# EAGLE board Graphic LCD Backpack-v15 (EAGLE 6.4)
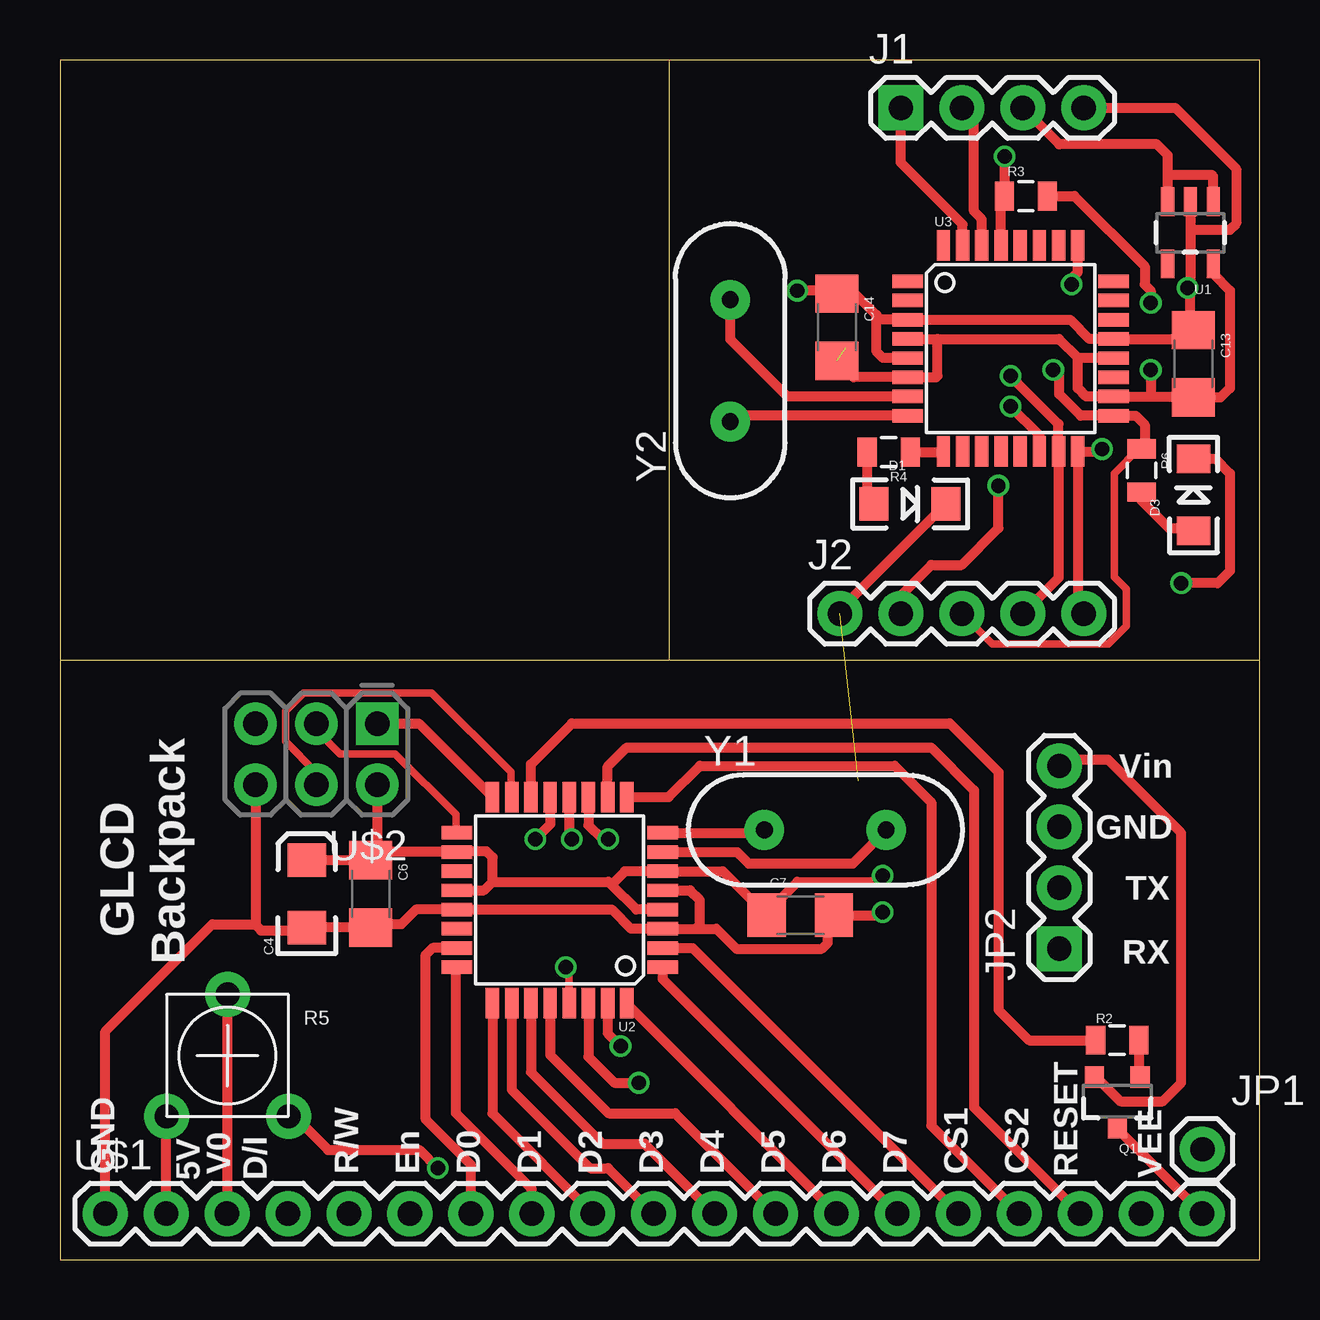
[diagram p0: board, top side]
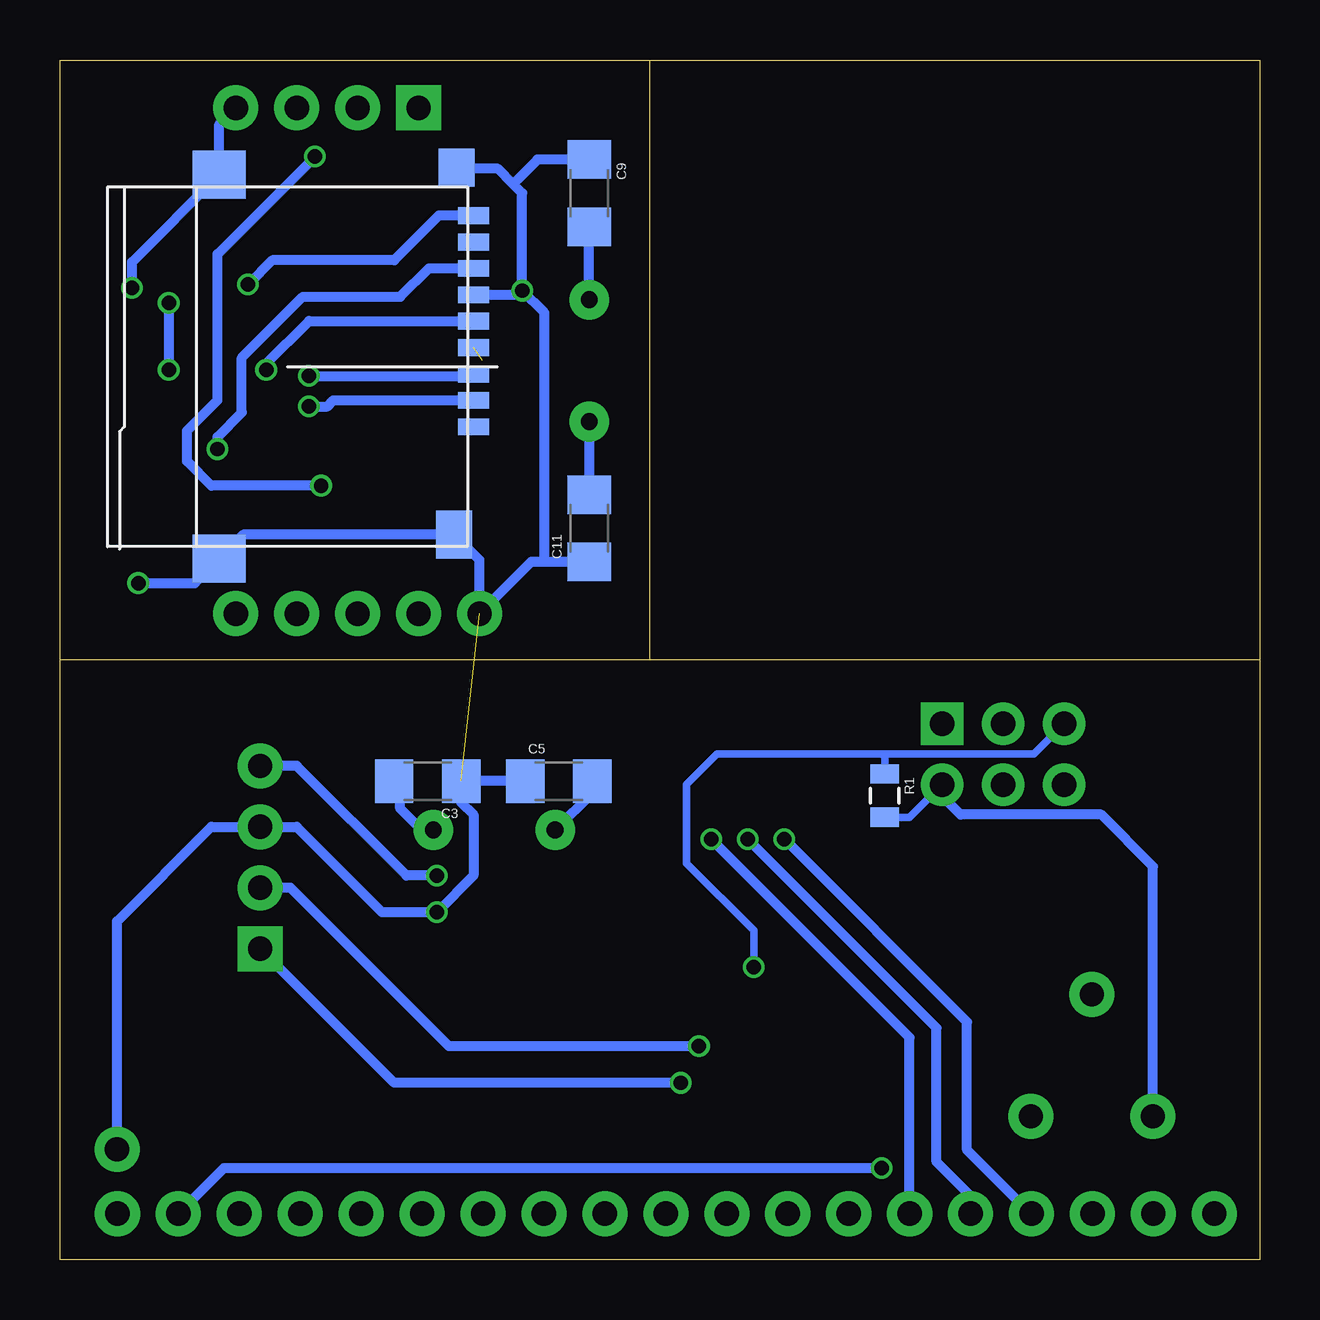
[diagram p1: board, bottom side, seen from below]

Size 50 x 50 mm. Coordinates in mm from the lower left corner, seen from the top.
Outline: 50,25 50,0 0,0 0,25
Outline: 50,25 50,50 25.4,50
Outline: 25.4,50 0,50 0,25
Outline: 0,25 25.4,25
Outline: 25.4,25 50,25
Outline: 25.4,25 25.4,50
Copper layers (1*16): Top 0.035mm / dielectric 1.5mm / Bottom 0.035mm
Design rules "SeeedStudio_2layer_DRU_no_angle_20140221": minimum track width 6mil, minimum drill 12mil, track to track 6mil, track to pad 6mil, pad to pad 6mil, via to via 6mil, smd to smd 0mil, copper to edge 10mil, drill to drill 10mil, minimum pad ring 10mil, minimum via ring 6mil, stop-mask expansion 2mil, vias tented up to drill 100mil, thermal gap 10mil
Net classes: 0 default: width 0.178 mm; 1 vcc: width 0.203 mm

## Footprints (pad centres in the part's own frame; a part is rotated, then mirrored left to right if it is on the bottom)
1206 = smd 1.6 x 1.8: 1 -1.4,0; 2 1.4,0
EIA3216 = smd 1.4 x 1.6: A 1.4,0; C -1.4,0
LED-1206 = smd 1.2 x 1.4: A -1.5,0; C 1.5,0
1X04 = drill 1.016 pad 1.88 square: 1 0,0 | drill 1.016 pad 1.88: 2 2.54,0; 3 5.08,0; 4 7.62,0
1X05 = drill 1.016 pad 1.88: 1 0,0; 2 2.54,0; 3 5.08,0; 4 7.62,0; 5 10.16,0
1X01 = drill 1.016 pad 1.88: 1 0,0
SOT23-3 = smd 0.8 x 0.9: 1 -0.95,-1; 2 0.95,-1; 3 0,1.1
0805 = smd 0.8 x 1.2: 1 -0.9,0; 2 0.9,0
TRIM_POT_PTH = drill 1 pad 1.88: 1 -2.54,-2.54; 2 0,2.54; 3 2.54,-2.54
SOT23-5 = smd 0.55 x 1.2: 1 -0.95,-1.3; 2 0,-1.3; 3 0.95,-1.3; 4 0.95,1.3; 5 -0.95,1.3
TQFP32-08 = smd 1.27 x 0.559: 1 -4.293,2.8; 2 -4.293,2; 3 -4.293,1.2; 4 -4.293,0.4; 5 -4.293,-0.4; 6 -4.293,-1.2; 7 -4.293,-2; 8 -4.293,-2.8; 17 4.293,-2.8; 18 4.293,-2; 19 4.293,-1.2; 20 4.293,-0.4; 21 4.293,0.4; 22 4.293,1.2; 23 4.293,2; 24 4.293,2.8 | smd 0.559 x 1.27: 9 -2.8,-4.293; 10 -2,-4.293; 11 -1.2,-4.293; 12 -0.4,-4.293; 13 0.4,-4.293; 14 1.2,-4.293; 15 2,-4.293; 16 2.8,-4.293; 25 2.8,4.293; 26 2,4.293; 27 1.2,4.293; 28 0.4,4.293; 29 -0.4,4.293; 30 -1.2,4.293; 31 -2,4.293; 32 -2.8,4.293
1X19 = drill 1.016 pad 1.88: 1 0,0; 2 2.54,0; 3 5.08,0; 4 7.62,0; 5 10.16,0; 6 12.7,0; 7 15.24,0; 8 17.78,0; 9 20.32,0; 10 22.86,0; 11 25.4,0; 12 27.94,0; 13 30.48,0; 14 33.02,0; 15 35.56,0; 16 38.1,0; 17 40.64,0; 18 43.18,0; 19 45.72,0
2X3-NS = drill 1.016 pad 1.778 square: 1 -2.54,-1.27 | drill 1.016 pad 1.778: 2 -2.54,1.27; 3 0,-1.27; 4 0,1.27; 5 2.54,-1.27; 6 2.54,1.27
USD_CONN = smd 0.7 x 1.3: CD -6.3,7.75; CLK -1.9,7.75; CS 1.4,7.75; DI 0.3,7.75; DO -4.1,7.75; GND -3,7.75; NC1 2.5,7.75; NC2 -5.2,7.75; VCC -0.8,7.75 | smd 1.6 x 1.5: SHIELD1 -8.3,7.05 | smd 2 x 1.5: SHIELD2 7,6.95 | smd 2 x 2.2: SHIELD3 -8,-2.85; SHIELD4 8,-2.85
HC49US = drill 0.7 pad 1.651: 1 -2.54,0; 2 2.54,0

## Placement (x,y rotation side)
C3  22pF  [1206]  34.67,19.94 180 bottom
C4  10uF  [EIA3216]  10.29,15.24 90 top
C5  22pF  [1206]  29.21,19.94 0 bottom
C6  0.1uF  [1206]  12.95,15.24 270 top
C7  0.1uF  [1206]  30.86,14.35 0 top
C9  [1206]  27.94,44.45 270 bottom
C11  [1206]  27.94,30.48 90 bottom
C13  [1206]  47.24,37.34 270 top
C14  [1206]  32.38,38.86 270 top
D1  Blue  [LED-1206]  35.43,31.5 0 top
D3  Green  [LED-1206]  47.24,31.88 90 top
J1  [1X04]  35.05,48.01 0 top
J2  [1X05]  32.51,26.92 0 top
JP1  M01PTH  [1X01]  47.62,4.59 0 top
JP2  Serial  [1X04]  41.66,12.95 90 top
Q1  TRANSISTOR_PNPSMD  [SOT23-3]  44.07,6.6 180 top
R1  10K  [0805]  15.62,19.34 270 bottom
R2  330  [0805]  44.07,9.14 0 top
R3  10K  [0805]  40.26,44.32 0 top
R4  1K  [0805]  34.54,33.66 180 top
R5  TRIMPOTPTH  [TRIM_POT_PTH]  6.99,8.51 0 top
R6  1K  [0805]  45.09,32.89 270 top
U1  3.3V MIC5205  [SOT23-5]  47.12,42.8 180 top
U2  Atmega328p  [TQFP32-08]  20.83,14.99 180 top
U3  ATMEGA328  [TQFP32-08]  39.62,37.97 0 top
U$1  M191X19  [1X19]  1.89,1.91 0 top
U$2  AVR_SPI_PRG_6NS  [2X3-NS]  10.69,21.07 180 top
U$3  USD_CONN  [USD_CONN]  40.51,37.21 270 bottom
Y1  8Mhz  [HC49US]  31.9,17.91 0 top
Y2  [HC49US]  27.94,37.47 90 top

## Library data of the parts
C3 C5-C7 C9 C11 C13 C14 = SparkFun-Capacitors
C4 D1 D3 JP2 Q1 R1-R4 R6 U1 U3 = SparkFun
J1 = SparkFun-Connectors; PROD_ID: CONN-09696
J2 JP1 U$1 U$2 = SparkFun-Connectors
R5 = SparkFun-Electromechanical
U2 = SparkFun-DigitalIC; PROD_ID: IC-09069; VALUE: ATMEGA328P
U$3 = myeagle
Y1 Y2 = SparkFun-FreqCtrl

## Nets
3.3V: C13.2 C14.2 R3.2 U1.5 U3.4 U3.6 U3.18 U3.20 U$3.VCC
5V: C4.A C6.1 C7.1 JP2.4 Q1.2 R1.2 R5.1 U2.4 U2.6 U2.18 U2.20 U$1.2 U$2.2
A: Q1.3 U$1.19
BL_EN: R2.1 U2.14
CD: U3.25 U$3.CD
CS: U3.14 U$3.CS
CS1: U2.2 U$1.15
CS2: U2.9 U$1.16
D/I: U2.13 U$1.4
DB0: U2.23 U$1.7
DB1: U2.24 U$1.8
DB2: U2.25 U$1.9
DB3: U2.26 U$1.10
DB4: U2.27 U$1.11
DB5: U2.28 U$1.12
DB6: U2.32 U$1.13
DB7: U2.1 U$1.14
EN: U2.11 U$1.6
GND: C3.1 C4.C C5.1 C6.2 C7.2 C9.1 C11.1 C13.1 C14.1 D1.C D3.C J1.4 J2.1 JP1.1 JP2.3 U1.2 U2.3 U2.5 U2.21 U3.3 U3.5 U3.21 U$1.1 U$2.6 U$3.GND U$3.SHIELD1 U$3.SHIELD2 U$3.SHIELD3 U$3.SHIELD4
MISO: U2.16 U$2.1
MISO1: J2.5 U3.16 U$3.DO
MOSI: U2.15 U$2.4
MOSI1: J2.4 U3.15 U$3.DI
N$1: Q1.1 R2.2
N$2: C3.2 U2.7 Y1.2
N$3: C5.2 U2.8 Y1.1
N$6: D1.A R4.2
N$7: D3.A R6.2
N$8: R4.1 U3.9
N$9: C9.2 U3.7 Y2.2
N$10: C11.2 U3.8 Y2.1
R/W: U2.12 U$1.5
RAW [vcc]: J1.3 U1.1 U1.3
RESET: U2.10 U$1.17
RST: R1.1 U2.29 U$2.5
RST1: J2.2 R3.1 U3.29
RXD: JP2.1 U2.30
RXI: J1.2 U3.30
SCK: U2.17 U$2.3
SCK1: J2.3 R6.1 U3.17 U$3.CLK
TXD: JP2.2 U2.31
TXO: J1.1 U3.31
V0: R5.2 U$1.3
VEE: R5.3 U$1.18

## Tracks (layer width: path | path; a pad name or v marks a point on that pad's centre or on a via)
3.3V  (via drill 0.6)  (1 unrouted)
  Top 0.406: U3.4 36.58,38.37 | 36.58,38.37 41.64,38.37 42.42,37.59 | 42.42,37.59 43.9,37.59 U3.20 | 36.58,38.37 36.58,36.83 36.52,36.77 U3.6 33.07,36.77 C14.2 | 42.42,37.59 42.42,36.32 42.77,35.97 U3.18 45.47,35.97 | 45.47,35.97 47.21,35.97 C13.2 48.38,35.94 48.77,36.32 48.77,40.39 48.07,41.09 U1.5 | R3.2 42.29,44.32 45.21,41.4 45.21,40.64 45.47,40.39 v45.47,39.88 | v45.47,37.08 45.47,35.97
  Bottom 0.406: v45.47,39.88 v45.47,37.08
5V  (via drill 0.6)
  Top 0.406: 13.3,16.99 U2.18 16.57,17.02 17.78,17.02 18.03,16.76 18.03,15.75 | 13.3,16.99 C6.1 C4.A | U2.20 17.67,15.39 18.03,15.75 | U$2.2 13.23,17.06 13.3,16.99 | U$1.2 4.43,5.95 R5.1 | 18.03,15.75 22.86,15.75 22.99,15.62 | 22.99,15.62 24.02,14.59 U2.4 | 22.99,15.62 23.55,16.19 U2.6 27.63,16.19 C7.1 29.46,14.47 30.73,15.75 34.04,15.75 v34.29,16 | Q1.2 43.2,7.6 44.2,6.6 45.97,6.6 46.74,7.37 46.74,17.78 43.69,20.83 41.91,20.83 JP2.4
  Bottom 0.305: R1.2 14.59,18.44 U$2.2
  Bottom 0.406: R5.1 4.45,16.38 6.6,18.54 12.46,18.54 13.23,19.3 U$2.2 | v34.29,16 35.56,16 40.13,20.57 JP2.4
A
  Top 0.406: Q1.3 44.07,5.45 U$1.19
BL_EN
  Top 0.406: U2.14 19.63,20.64 21.34,22.35 37.08,22.35 39.12,20.32 39.12,10.41 40.39,9.14 R2.1
CD  (via drill 0.6)
  Top 0.406: v42.16,40.64 42.16,40.89 42.42,41.15 U3.25
  Bottom 0.406: U$3.CD 34.21,43.51 36.07,41.66 41.15,41.66 v42.16,40.64
CS  (via drill 0.6)
  Top 0.406: U3.14 40.82,34.36 v39.62,35.56
  Bottom 0.406: v39.62,35.56 38.86,35.56 38.61,35.81 U$3.CS
CS1
  Top 0.406: U2.2 26.37,12.99 U$1.15
CS2
  Top 0.406: U2.9 25.38,19.28 26.67,20.57 34.8,20.57 36.32,19.05 36.32,5.58 U$1.16
D/I  (via drill 0.6)
  Top 0.406: v19.81,17.53 20.43,18.14 U2.13
  Bottom 0.406: U$1.4 9.53,1.91 12.19,4.57 12.19,9.91 v19.81,17.53
DB0
  Top 0.406: U$1.7 17.13,3.96 15.24,5.84 15.24,12.7 15.53,12.99 U2.23
DB1
  Top 0.406: U$1.8 19.67,2.94 16.51,6.1 16.51,12.21 U2.24
DB2
  Top 0.406: U2.25 18.03,6.09 U$1.9
DB3
  Top 0.406: U2.26 18.83,7.08 22.1,3.81 22.85,3.81 U$1.10
DB4
  Top 0.406: U2.27 19.63,7.8 22.61,4.83 24.37,4.83 U$1.11
DB5
  Top 0.406: U2.28 20.43,8.53 22.86,6.1 25.64,6.1 U$1.12
DB6
  Top 0.406: U2.32 23.63,10.65 U$1.13
DB7
  Top 0.406: U2.1 25.12,11.7 U$1.14
EN  (via drill 0.6)
  Top 0.406: v22.86,17.53 22.61,17.53 22.03,18.1 U2.11
  Bottom 0.406: U$1.6 14.59,9.25 v22.86,17.53
GND  (via drill 0.6)  (1 unrouted)
  Top 0.406: U$2.6 8.15,13.95 | 8.15,13.95 8.38,13.72 10.16,13.72 C4.C C6.2 13.08,13.97 14.22,13.97 14.84,14.59 U2.21 23.01,14.59 23.81,13.79 U2.3 | U$1.1 1.89,9.51 6.35,13.97 8.13,13.97 8.15,13.95 | U2.3 27.36,13.79 28.19,12.95 31.75,12.95 32,13.21 32,14.09 C7.2 34.16,14.35 v34.29,14.48 | U2.3 26.49,13.79 26.67,13.97 26.67,14.99 26.27,15.39 U2.5 | U3.5 34.31,37.57 34.04,37.85 34.04,39.12 | 34.04,39.12 34.09,39.17 U3.3 42.11,39.17 42.91,38.37 U3.21 46.88,38.37 C13.1 47.12,38.87 47.12,40.38 v47,40.5 47.12,40.62 47.12,42.93 | 34.04,39.12 34.04,39.37 33.02,40.39 32.51,40.39 | 32.51,40.39 C14.1 | U1.2 47.12,42.93 | J1.4 46.48,48.01 49.02,45.47 49.02,43.18 48.77,42.93 47.12,42.93 | 32.51,40.39 v30.73,40.39 | J2.1 32.51,27.07 D1.C | D3.C 48.16,33.38 48.77,32.77 48.77,28.7 48.26,28.19 v46.74,28.19
  Bottom 0.406: JP1.1 47.62,14.1 43.69,18.03 JP2.3 40.13,18.03 36.58,14.48 v34.29,14.48 32.77,16 32.77,18.54 33.27,19.05 C3.1 C5.1 | v30.73,40.39 30.73,44.45 31.11,44.83 | 31.11,44.83 31.75,45.47 33.42,45.47 U$3.SHIELD1 | C9.1 30.1,45.85 31.11,44.83 | J1.4 43.36,47.31 U$3.SHIELD3 47,41.57 v47,40.5 | C11.1 29.81,29.08 | 29.81,29.08 30.36,29.08 J2.1 32.51,29.16 U$3.SHIELD2 42.36,30.21 U$3.SHIELD4 44.38,28.19 v46.74,28.19 | 29.81,29.08 29.81,39.46 v30.73,40.39 | U$3.GND 30.91,40.21 v30.73,40.39
MISO
  Top 0.406: U$2.1 14.97,22.34 U2.16
MISO1  (via drill 0.6)
  Top 0.406: J2.5 42.42,27.17 U3.16 43.33,33.68 v43.43,33.78
  Bottom 0.406: U$3.DO 34.63,41.31 35.81,40.13 39.88,40.13 42.42,37.59 42.42,35.31 43.43,34.29 v43.43,33.78
MOSI
  Top 0.305: U$2.4 10.69,20.3 9.4,21.59 9.4,22.86 10.16,23.62 15.49,23.62 18.8,20.32 18.8,19.31 U2.15
MOSI1  (via drill 0.6)
  Top 0.406: J2.4 41.62,28.42 U3.15 41.62,34.83 v39.62,36.83
  Bottom 0.406: v39.62,36.83 32.84,36.83 U$3.DI
N$1
  Top 0.406: R2.2 44.97,7.65 Q1.1
N$2
  Top 0.406: U2.7 28.23,16.99 28.7,16.51 33.04,16.51 Y1.2
  Bottom 0.406: Y1.2 34.92,17.91 35.81,18.8 35.81,19.68 C3.2
N$3
  Top 0.406: U2.8 29.24,17.79 Y1.1
  Bottom 0.406: C5.2 27.81,19.46 Y1.1
N$6
  Top 0.406: R4.2 33.64,31.79 D1.A
N$7
  Top 0.406: R6.2 45.09,31.62 46.23,30.48 47.14,30.48 D3.A
N$8
  Top 0.406: R4.1 36.8,33.66 U3.9
N$9
  Top 0.406: U3.7 30.32,35.97 27.94,38.35 Y2.2
  Bottom 0.406: Y2.2 C9.2
N$10
  Top 0.406: U3.8 28.19,35.17 Y2.1
  Bottom 0.406: Y2.1 C11.2
R/W  (via drill 0.6)
  Top 0.406: U2.12 21.23,17.63 v21.34,17.53
  Bottom 0.406: U$1.5 12.05,2.65 13.46,4.06 13.46,9.65 v21.34,17.53
RAW
  Top 0.406: U1.3 46.17,45.15 | 46.17,45.15 46.23,45.21 48.01,45.21 48.07,45.15 U1.1 | 46.17,45.15 46.17,46.03 45.72,46.48 41.66,46.48 J1.3
RESET
  Top 0.406: U2.10 22.83,20.54 23.62,21.34 36.32,21.34 38.1,19.56 38.1,6.34 U$1.17
RST  (via drill 0.6)
  Top 0.305: U2.29 21.23,12.05 v21.08,12.19
  Bottom 0.305: v21.08,12.19 21.08,13.72 23.88,16.51 23.88,19.81 22.61,21.08 15.75,21.08 | 15.75,21.08 9.4,21.08 U$2.5 | R1.1 15.62,20.95 15.75,21.08
RST1  (via drill 0.6)
  Top 0.406: U3.29 39.22,44.19 R3.1 39.37,44.33 v39.37,45.97 | J2.2 35.05,27.69 36.32,28.96 37.59,28.96 39.12,30.48 v39.12,32.26
  Bottom 0.406: v39.12,32.26 43.69,32.26 44.7,33.27 44.7,34.54 43.43,35.81 43.43,41.91 v39.37,45.97
RXD  (via drill 0.6)
  Top 0.406: U2.30 22.03,8.45 23.11,7.37 v24.13,7.37
  Bottom 0.406: v24.13,7.37 36.07,7.37 JP2.1
RXI
  Top 0.406: U3.30 38.42,43.36 38.1,43.69 38.1,47.5 J1.2
SCK
  Top 0.305: U$2.3 10.69,22.08 11.68,21.08 13.97,21.08 16.51,18.54 16.51,17.81 U2.17
SCK1  (via drill 0.6)
  Top 0.305: R6.1 44.97,33.79 43.94,32.77 43.94,28.45 44.45,27.94 44.45,26.42 43.69,25.65 38.86,25.65 J2.3
  Top 0.406: R6.1 45.21,33.92 45.21,34.8 44.84,35.17 U3.17 42.55,35.17 41.66,36.07 41.66,36.83 v41.4,37.08
  Bottom 0.406: v41.4,37.08 41.4,37.34 39.62,39.12 U$3.CLK
TXD  (via drill 0.6)
  Top 0.406: U2.31 22.83,9.43 v23.37,8.89
  Bottom 0.406: v23.37,8.89 33.78,8.89 40.39,15.49 JP2.2
TXO
  Top 0.406: U3.31 37.62,43.15 35.05,45.72 J1.1
V0
  Top 0.406: U$1.3 6.99,1.93 R5.2
VEE  (via drill 0.6)
  Top 0.406: R5.3 9.78,5.97 11.18,4.57 14.99,4.57 v15.75,3.81
  Bottom 0.406: v15.75,3.81 43.17,3.81 U$1.18

## Text on the board
tPlace: Vin | GND | TX | RX | GLCD / Backpack | GND | V0 | R/W | En | D0 | D1 | D2 | D3 | D4 | D5 | D6 | D7 | CS1 | CS2 | 5V | D/I | RESET | VEE